# EAGLE board circuit1 (EAGLE 9.7.0)

Size 309.87 x 134.98 mm. Coordinates in mm from the lower left corner, seen from the top.
Outline: 0,0 309.87,0 309.87,134.98 0,134.98 0,0
Copper layers (1*16): Top 0.035mm / dielectric 1.5mm / Bottom 0.035mm
Design rules "default": minimum track width 6mil, minimum drill 0.35mm, track to track 6mil, track to pad 6mil, pad to pad 6mil, via to via 6mil, smd to smd 6mil, copper to edge 40mil, drill to drill 6mil, minimum pad ring 10mil, minimum via ring 8mil, stop-mask expansion 4mil, vias tented up to drill 0mil, thermal gap 10mil

## Footprints (pad centres in the part's own frame; a part is rotated, then mirrored left to right if it is on the bottom)
BATTERY-GENERIC = drill 1.118 pad 3.15 octagon: + 2.54,0; - -2.54,0
LEDRD254W60D565H860B = drill 0.981 pad 1.581: 1 -1.27,0; 2 1.27,0
LED-RGB-5MM = drill 0.9: B 0.635,0.635; C -0.635,-0.635; G 1.905,-0.635; R -1.905,0.635
MQ-XX-SOCKET = drill 1.27: 1 -6.223,6.223; 2 -8.788,0; 3 -6.223,-6.223; 4 6.223,-6.223; 5 8.788,0; 6 6.223,6.223
MIC127-140-A01 = smd 0.8 x 2.502: P$1 24.765,2.54; P$2 23.495,2.54; P$3 22.225,2.54; P$4 20.955,2.54; P$5 19.685,2.54; P$6 18.415,2.54; P$7 17.145,2.54; P$8 15.875,2.54; P$9 14.605,2.54; P$10 13.335,2.54; P$11 12.065,2.54; P$12 10.795,2.54; P$13 9.525,2.54; P$14 8.255,2.54; P$15 6.985,2.54; P$16 5.715,2.54; P$17 4.445,2.54; P$18 3.175,2.54; P$19 1.905,2.54; P$20 0.635,2.54; P$21 -0.635,2.54; P$22 -1.905,2.54; P$23 -3.175,2.54; P$24 -4.445,2.54; P$25 -5.715,2.54; P$26 -6.985,2.54; P$27 -8.255,2.54; P$28 -9.525,2.54; P$29 -10.795,2.54; P$30 -12.065,2.54; P$31 -13.335,2.54; P$32 -14.605,2.54; P$33 -15.875,2.54; P$34 -17.145,2.54; P$35 -18.415,2.54; P$36 -19.685,2.54; P$37 -20.955,2.54; P$38 -22.225,2.54; P$39 -23.495,2.54; P$40 -24.765,2.54 | drill 1.1 pad 2.3: P$41 26.899,-1.168; P$42 -26.899,-1.168
28015 = drill 1.016 long: 1 -2.54,0; 2 0,0; 3 2.54,0
1X02 = drill 1.016 long: 1 -1.27,0; 2 1.27,0
SG90 = drill 1.016 long: 1 -2.54,0; 2 0,0; 3 2.54,0
ARDUINO-UNO-R3-SHIELD = drill 1.016 pad 1.88: 3.3V 24.13,-2.54; 5V 24.13,0; A0 24.13,12.7; A1 24.13,15.24; A2 24.13,17.78; A3 24.13,20.32; A4 24.13,22.86; A5 24.13,25.4; AREF -24.13,-13.97; D2 -24.13,20.32; D3 -24.13,17.78; D4 -24.13,15.24; D5 -24.13,12.7; D6 -24.13,10.16; D7 -24.13,7.62; D8 -24.13,3.81; D9 -24.13,1.27; D10 -24.13,-1.27; D11 -24.13,-3.81; D12 -24.13,-6.35; D13 -24.13,-8.89; GND@0 24.13,2.54; GND@1 24.13,5.08; GND@2 -24.13,-11.43; IOREF 24.13,-7.62; NC 24.13,-10.16; RES 24.13,-5.08; RX -24.13,25.4; SCL -24.13,-19.05; SDA -24.13,-16.51; TX -24.13,22.86; VIN 24.13,7.62

## Placement (x,y rotation side)
BAT1  4.5V  [BATTERY-GENERIC]  301.61,101.57 180 top
D1  RED  [LEDRD254W60D565H860B]  15.8,97.75 180 top
D2  LED-RGBRCBG-PTH  [LED-RGB-5MM]  92.54,109.85 0 top
GAS1  GAS-SENSORMQ-XX-SOCKET  [MQ-XX-SOCKET]  14.22,12.92 270 top
MB1  MICRO:BIT_MIC127  [MIC127-140-A01]  253.35,124.18 180 top
PING1  DISTANCE-SENSOR-3PIN  [28015]  198.87,57.34 0 top
R1  FORCE-SENSOR  [1X02]  134.58,93.56 0 top
SERVO1  SERVOSG90  [SG90]  250.81,93.95 0 top
U1  ARDUINO-UNO-R3-SHIELD  [ARDUINO-UNO-R3-SHIELD]  126.32,43.25 270 top

## Library data of the parts
BAT1 D2 GAS1 MB1 PING1 R1 SERVO1 U1 = Tinkercad
D1 = Tinkercad; CATEGORY: Opto-Electronic; SUB-CATEGORY: LED; VALUE: LED_RED

## Nets
BAT1+: BAT1.+ GAS1.2 PING1.2 R1.2 SERVO1.2 U1.5V
BAT1-: BAT1.- D1.2 D2.C GAS1.1 GAS1.3 GAS1.4 GAS1.5 GAS1.6 MB1.P$35 MB1.P$36 MB1.P$37 MB1.P$38 MB1.P$39 MB1.P$40 PING1.1 SERVO1.1 U1.A0 U1.GND@0 U1.GND@1 U1.GND@2
MB1_P2: MB1.P$19 MB1.P$20 MB1.P$21 MB1.P$22 SERVO1.3 U1.D9
U1_A1: R1.1 U1.A1
U1_D7: PING1.3 U1.D7
U1_D10: D1.1 U1.D10
U1_D11: D2.G U1.D11

## Tracks (layer width: path | path; a pad name or v marks a point on that pad's centre or on a via)
BAT1+  (5 unrouted)
BAT1-  (19 unrouted)
MB1_P2  (5 unrouted)
U1_A1  (1 unrouted)
U1_D7  (1 unrouted)
U1_D10  (1 unrouted)
U1_D11  (1 unrouted)